# EAGLE board seb_v1 (EAGLE 7.7.0)

Size 7.92 x 50.02 mm. Coordinates in mm from the lower left corner, seen from the top.
Outline: 0,0 7.92,0 7.92,50.02 arc-1 0,50 0,0
Copper layers (1*16): Top 0.035mm / dielectric 1.5mm / Bottom 0.035mm
Design rules "default": minimum track width 10mil, minimum drill 24mil, track to track 8mil, track to pad 8mil, pad to pad 8mil, via to via 8mil, smd to smd 8mil, copper to edge 40mil, drill to drill 8mil, minimum pad ring 10mil, minimum via ring 8mil, stop-mask expansion 4mil, vias tented up to drill 0mil, thermal gap 10mil

## Footprints (pad centres in the part's own frame; a part is rotated, then mirrored left to right if it is on the bottom)
C0603 = smd 1.1 x 1: 1 -0.85,0; 2 0.85,0
SML0603 = smd 0.8 x 0.8: A 0.75,0; C -0.75,0
R0603 = smd 1 x 1.1: 1 -0.85,0; 2 0.85,0
R0805W = smd 1.5 x 1: 1 -1.052,0; 2 1.052,0

## Placement (x,y rotation side)
C1  [C0603]  -21.59,5.08 0 top  (outside the outline)
C2  [C0603]  -15.24,8.89 0 top  (outside the outline)
LED_G_1  [SML0603]  6,45 90 top
LED_G_2  [SML0603]  6,35 90 top
LED_G_3  [SML0603]  6,25 90 top
LED_G_4  [SML0603]  6,15 90 top
LED_G_5  [SML0603]  6,5 90 top
LED_W_1  [SML0603]  1.5,45 90 top
LED_W_2  [SML0603]  1.5,35 90 top
LED_W_3  [SML0603]  1.5,25 90 top
LED_W_4  [SML0603]  1.5,15 90 top
LED_W_5  [SML0603]  1.5,5 90 top
R1  [R0603]  5.99,44.9 90 bottom
R2  [R0603]  6,35 270 bottom
R3  [R0603]  6,25 270 bottom
R4  [R0603]  6,15 270 bottom
R5  [R0603]  6,5 270 bottom
R9  [R0603]  1.51,44.91 90 bottom
R10  [R0603]  1.29,34.91 90 bottom
R11  [R0603]  1.5,25 270 bottom
R12  [R0603]  1.5,15 270 bottom
R13  [R0603]  1.5,5 270 bottom
R17  [R0805W]  -20.32,-3.81 0 top  (outside the outline)

## Library data of the parts
C1 C2 R1-R5 R9-R13 R17 = rcl
LED_G_1-LED_G_5 LED_W_1-LED_W_5 = led

## Nets
GND: LED_G_1.C LED_G_2.C LED_G_3.C LED_G_4.C LED_G_5.C LED_W_1.C LED_W_2.C LED_W_3.C LED_W_4.C LED_W_5.C
N$1: LED_G_1.A R1.2
N$2: LED_G_2.A R2.2
N$3: LED_G_3.A R3.2
N$4: LED_G_4.A R4.2
N$5: LED_G_5.A R5.2
N$9: LED_W_1.A R9.2
N$10: LED_W_2.A R10.2
N$11: LED_W_3.A R11.2
N$12: LED_W_4.A R12.2
N$13: LED_W_5.A R13.2
N$17: R9.1 R10.1 R11.1 R12.1 R13.1
N$18: R1.1 R2.1 R3.1 R4.1 R5.1

## Tracks (layer width: path | path; a pad name or v marks a point on that pad's centre or on a via)
GND  (9 unrouted)
N$1  (1 unrouted)
N$2  (1 unrouted)
N$3  (1 unrouted)
N$4  (1 unrouted)
N$5  (1 unrouted)
N$9  (1 unrouted)
N$10  (1 unrouted)
N$11  (1 unrouted)
N$12  (1 unrouted)
N$13  (1 unrouted)
N$17  (4 unrouted)
N$18  (4 unrouted)
(copper drawn outside any net)
  shapes: Top area x10